# Altium PCB MCU_PSU_Webench.PcbDoc
Units mil, origin at the board's own origin, x right, y up, seen from the top; angles counter-clockwise.
Board outline 1800 x 1500 mil, 4 copper layers (Top Layer, MidLayer1, MidLayer2, Bottom Layer); 12 components, 5 nets, 28 pads, 15 vias.
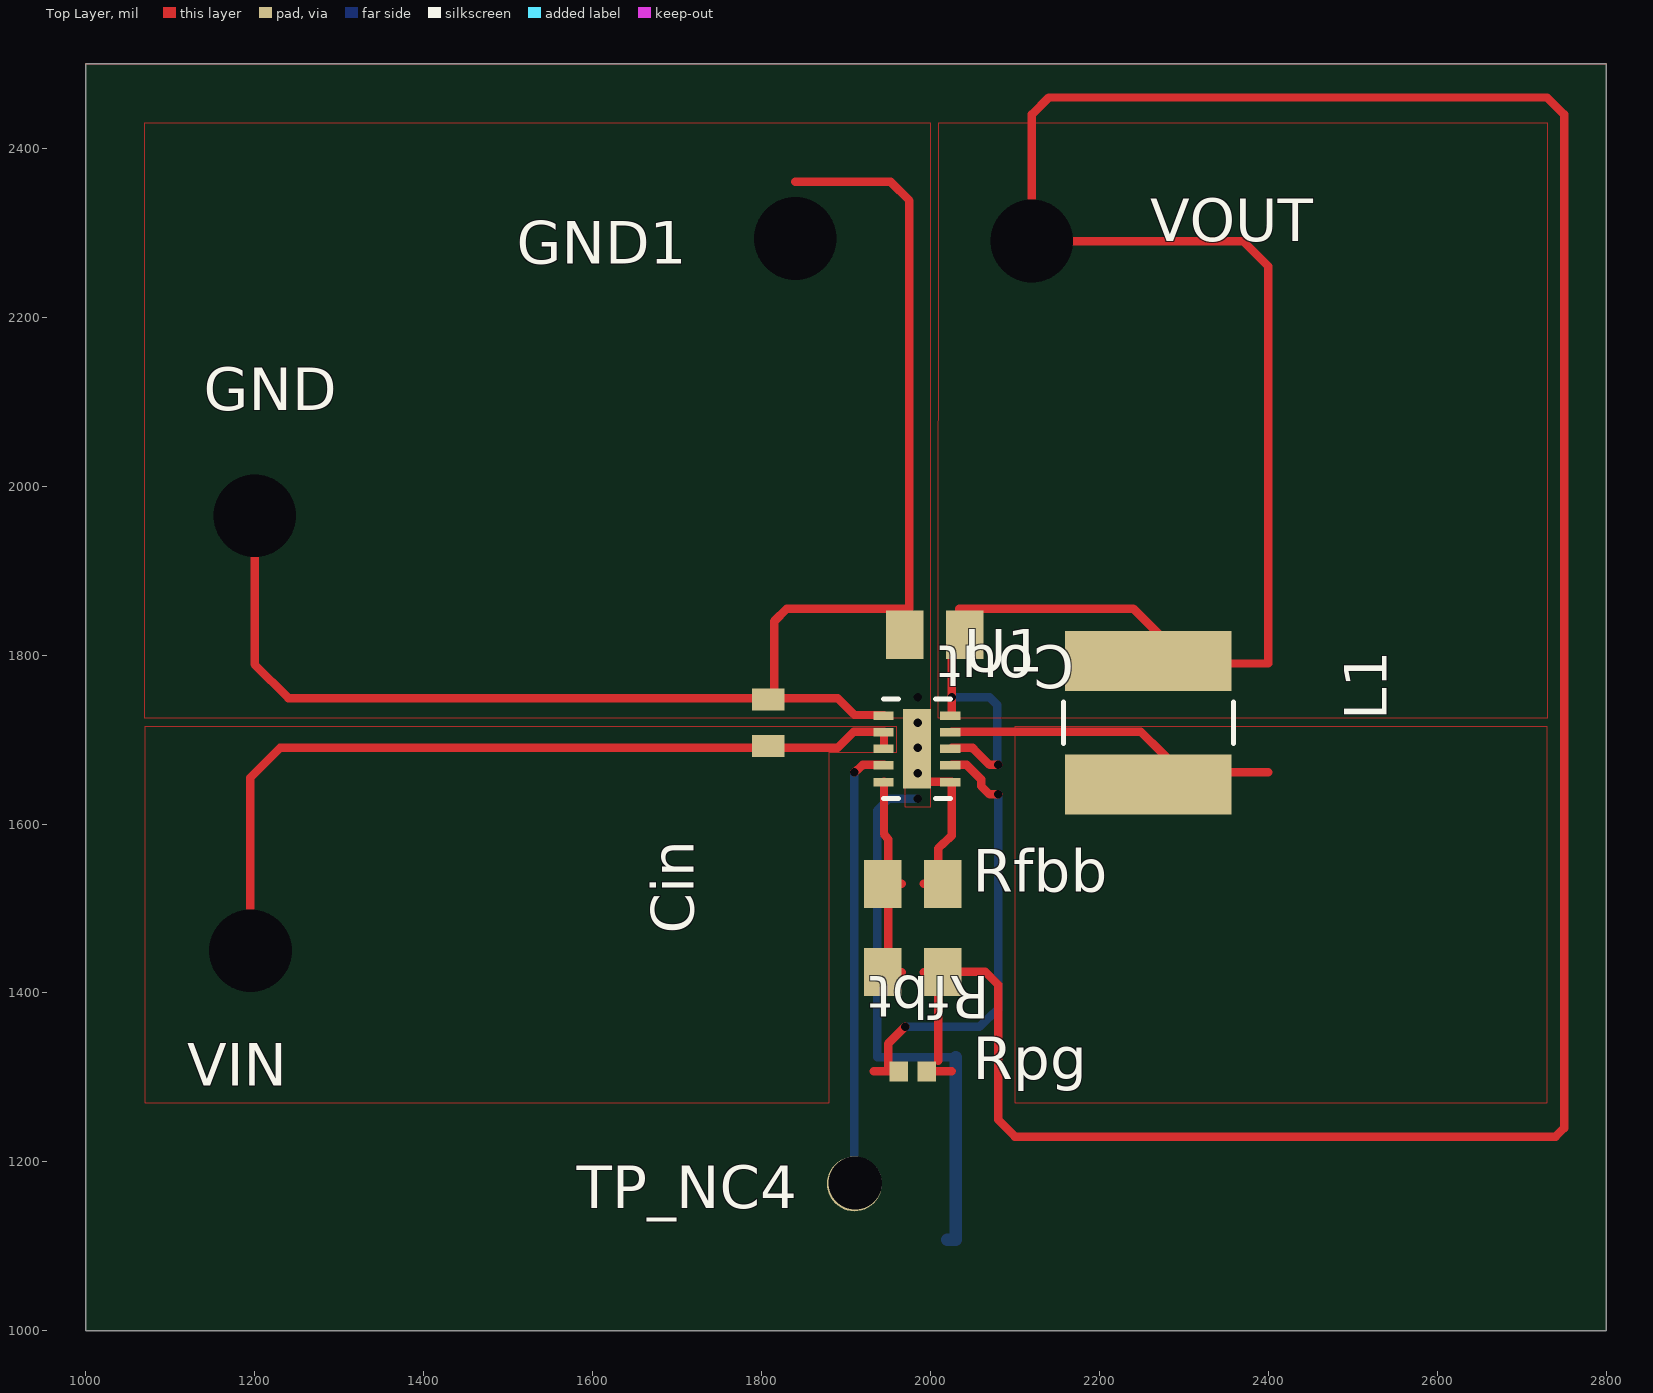
[diagram p0: Top Layer view]
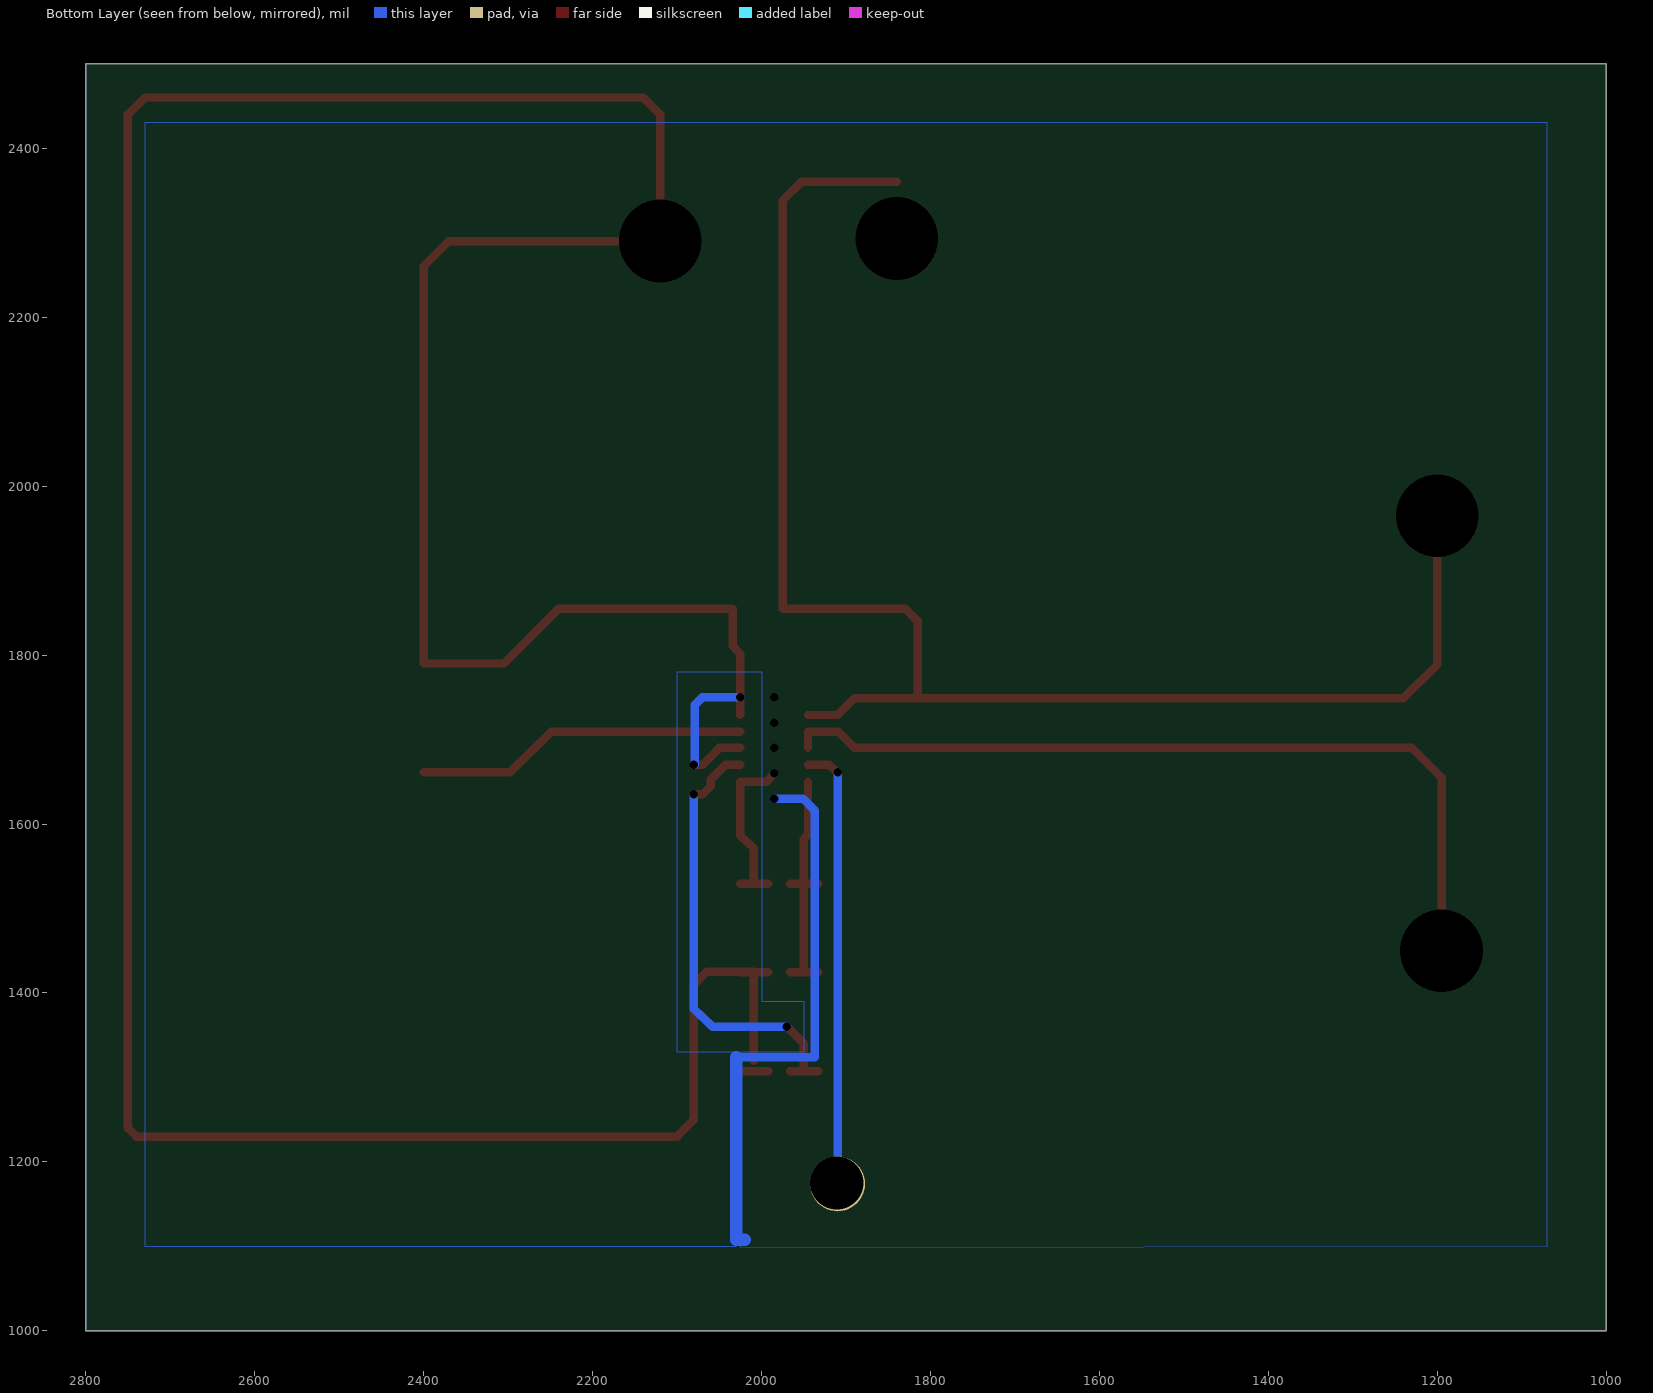
[diagram p1: Bottom Layer view, seen from below]

## Layer stack, top to bottom
Top Layer: signal copper 1.4
Dielectric: core 12.6, FR-4, Dk 4.8
MidLayer1: signal copper 1.4
Dielectric: prepreg 12.6, FR-4, Dk 4.8
MidLayer2: signal copper 1.4
Dielectric: core 12.6, FR-4, Dk 4.8
Bottom Layer: signal copper 1.4

## Board outline
1000,1000 2800,1000 2800,2500 1000,2500

## Design rules (kind name [scope] priority, off if disabled: settings)
PlaneConnect [All] p0: scope1count=1 scope1_0_kind=Board scope1_0_value=Board scope2count=1 scope2_0_kind=Board scope2_0_value=Board commentlength=0 planeconnectstyle=Direct reliefexpansion=20 reliefentries=4 reliefconductorwidth=10 reliefairgap=10
PlaneConnect [All] p1: planeconnectstyle=Direct reliefexpansion=20 reliefentries=4 reliefconductorwidth=10 reliefairgap=10
PolygonConnect [All] p0: scope1count=1 scope1_0_kind=Board scope1_0_value=Board scope2count=1 scope2_0_kind=Board scope2_0_value=Board commentlength=0 connectstyle=Direct reliefconductorwidth=10 reliefentries=4 polygonreliefangle="90 Angle"
PolygonConnect [All] p1: connectstyle=Direct reliefconductorwidth=10 reliefentries=4 polygonreliefangle="90 Angle"

## Components (designator, comment, footprint, x,y, rotation, side; value= is the part's Value field where it differs from the comment)
Cin "" 0603 1808,1720 r90 top
Cout "" 0805 2005,1824 r180 top
GND "" TP-1502 1199,1964 r0 top
GND1 "" TP-1502 1840,2292 r0 top
L1 "" SDR0503 2258,1720 r90 top
Rfbb "" 0805 1979,1529 r0 top
Rfbt "" 0805 1979,1425 r180 top
Rpg "" 0402 1979,1307 r0 top
TP_NC4 "" TP-1502 1910,1174 r0 top
U1 "" R-PWSON-N10 1984,1689 r0 top
VIN "" TP-1502 1194,1449 r0 top
VOUT "" TP-1502 2120,2289 r0 top

## Footprints (in the part's own frame and the unit in brackets; to place one, negate y for a bottom-side part, rotate by r counter-clockwise, add the part's x,y. Pads: shape width x height; smd on the part's side, far side on the other; paste and mask are expansions set on the pad)
0402 [mil]
  rect 22x24 smd: 1(-16.5,0) 2(16.5,0)
0603 [mil]
  rect 26x38 smd: 1(-27.5,0) 2(27.5,0)
0805 [mil]
  rect 44x57 smd: 1(-35.5,0) 2(35.5,0)
R-PWSON-N10 [mil]
  rect 24x10 smd: 1(-39.5,39.37) 2(-39.5,19.68) 3(-39.5,0) 4(-39.5,-19.68) 5(-39.5,-39.37) 6(39.5,-39.37) 7(39.5,-19.68) 8(39.5,0) 9(39.5,19.68) 10(39.5,39.37)
  rect 33x94 smd: 11(0,0)
  silkscreen extent -40,-59 40,59
SDR0503 [mil]
  rect 71x197 smd: 1(-73,0) 2(73,0)
  silkscreen extent -25,-100 25,100
TP-1502 [mil]
  round 65 / inner round 0 / far side round 65 hole 32: 1(0,0)

## Via types
v1: diameter 0, hole 10, Top Layer to Bottom Layer, 10 vias
v2: diameter 0, hole 98, Top Layer to Bottom Layer, 4 vias
v3: diameter 0, hole 63, Top Layer to Bottom Layer, 1 vias

## Nets (pads, with @x,y where several pads share a name; then routed paths per layer and width w, separated by ;. In a path a pad name is that pad's centre, name@x,y a point inside that pad or via, vN(x,y) a via of type N, cw(c..) or ccw(c..) an arc to the next point about the centre after c; other vN are vias at no path point)
0: Cin.2 Cout.2 GND1.1 GND.1 Rfbb.1 Rfbb.2 Rfbt.2 TP_NC4.1 U1.1 U1.4 U1.5 U1.6 U1.11 | length 3516.6
  Top Layer w10: v2(1200,1965) 1200,1789 1240,1749 Cin.2@1815,1749 ; 1840,2360 1953,2360 1975,2338 1975,1855 1830,1855 1815,1840 Cin.2@1815,1749 ; v1(1910,1661) 1920,1670 U1.4@1945,1670 ; Rfbt.2@1933,1424.5 1966,1424.5 ; Rfbb.1@1933,1529.5 1966,1529.5 ; U1.5@1945,1650 1945,1588 1950,1582 1950,1530 Rfbt.2@1950,1425 ; U1.1@1945,1729 1910,1729 1890,1749 Cin.2@1815,1749 ; v1(1985,1660) 1994,1650 2025,1650 2025,1586 2009,1571 Rfbb.2@2009,1530 ; 1992,1529.5 Rfbb.2@2025,1529.5
  Bottom Layer w10: TP_NC4.1@1910,1175 v1(1910,1661) ; v1(1985,1630) 1951,1630 1937,1616 1937,1324 2030,1324
  Bottom Layer w15: 2020,1108 2030,1108 2030,1324
  other v1: 1985,1690 1985,1720 1985,1750
  other v2: 1840,2293
  other v3: 1911,1175
1: Cin.1 U1.2 U1.3 VIN.1 | length 996.4
  Top Layer w10: v2(1195,1450) 1195,1655 1230,1690 1815,1690 1890,1690 1909,1709 1945,1709 U1.3@1945,1690
2: L1.1 U1.9 | length 394.6
  Top Layer w10: U1.9@2025,1709 2249,1709 2298,1661 2400,1661
3: Rpg.1 U1.7 | length 539.9
  Top Layer w10: 1933,1307.5 Rpg.1@1966,1307.5 ; 1950,1308 1950,1340 v1(1970,1360) ; U1.7@2025,1670 2043,1670 2060,1653 2060,1645 2070,1635 v1(2080,1635)
  Bottom Layer w10: v1(1970,1360) 2058,1360 2080,1381 v1(2080,1635)
4: Cout.1 L1.2 Rfbt.1 Rpg.2 U1.8 U1.10 VOUT.1 | length 4564.6
  Top Layer w10: Rpg.2@1992,1307.5 2025,1307.5 ; 1992,1424.5 Rfbt.1@2025,1424.5 ; 2009,1320 2009,1425 2065,1425 2080,1410 2080,1250 2100,1230 2740,1230 2750,1240 2750,2440 2730,2460 2140,2460 2120,2440 v2(2120,2290) 2370,2290 2400,2260 2400,1790 2305,1790 2240,1855 2034,1855 2034,1811 2025,1801 v1(2025,1750) U1.10@2025,1729 ; U1.8@2025,1690 2050,1690 2050,1689 2051,1689 2070,1670 v1(2080,1670)
  Bottom Layer w10: v1(2025,1750) 2070,1750 2079,1741 2079,1670

## Polygon pours and split planes (outlines as drawn)
4 on Top Layer " " (solid, pour order 0): 2010,2430 2730,2430 2730,1725 2009,1725
2 on Top Layer " " (solid, pour order 1): 2100,1715 2100,1270 2730,1270 2730,1715
1 on Top Layer " " (solid, pour order 2): 1070,1715 1070,1270 1880,1270 1880,1685 1960,1685 1960,1715
0 on Top Layer " " (solid, pour order 3): 1070,1725 1070,2430 2000,2430 2000,1620 1970,1620 1970,1725
0 on Bottom Layer " " (solid, pour order 4): 1070,2430 2730,2430 2730,1100 2030,1100 2030,1330 2100,1330 2100,1780 2000,1780 2000,1390 1950,1390 1950,1330 2025,1330 2025,1099 1070,1100

## Other copper
Multi-Layer:
  the board outline again, w1